# Altium PCB Voltage Indicator.PcbDoc
Units mm, origin at the board's own origin, x right, y up, seen from the top; angles counter-clockwise.
Board outline 39.75 x 28.07 mm, 2 copper layers (Top Layer, Bottom Layer); 5 components, 4 nets, 16 pads, 2 vias.
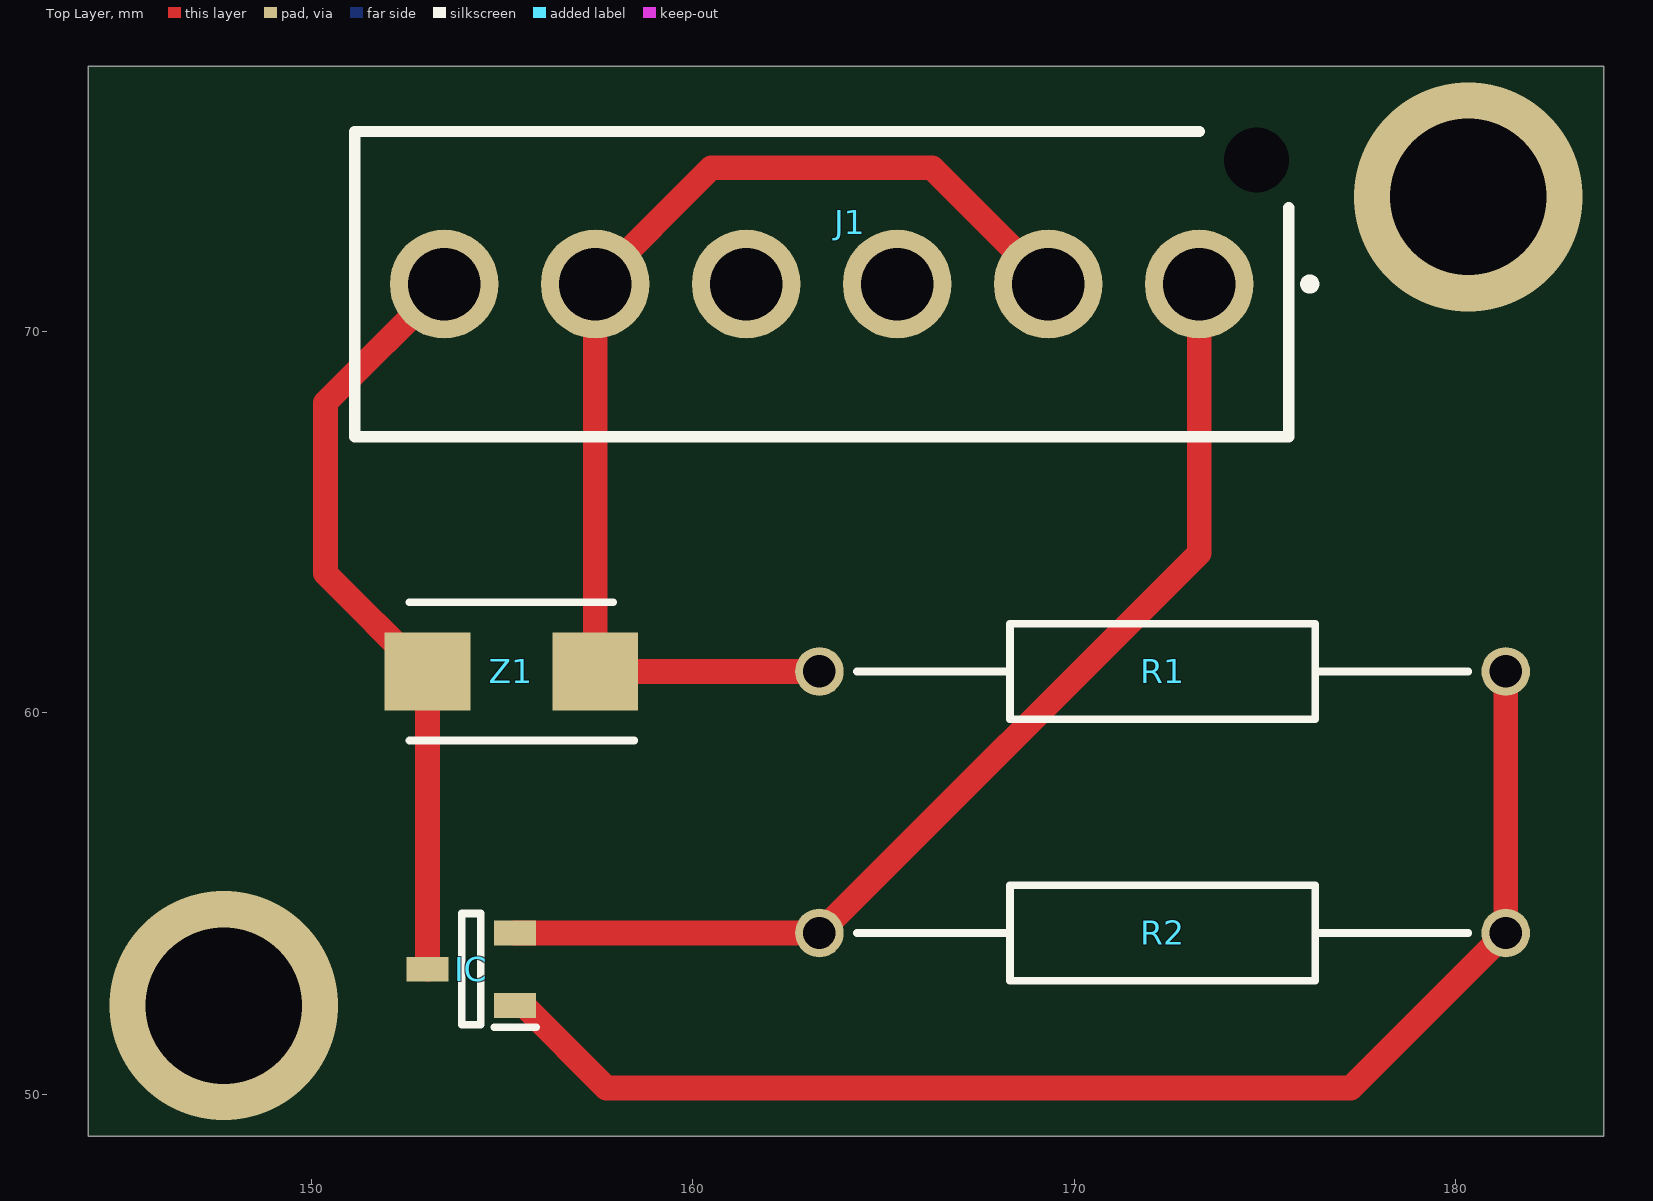
[diagram p0: Top Layer view]
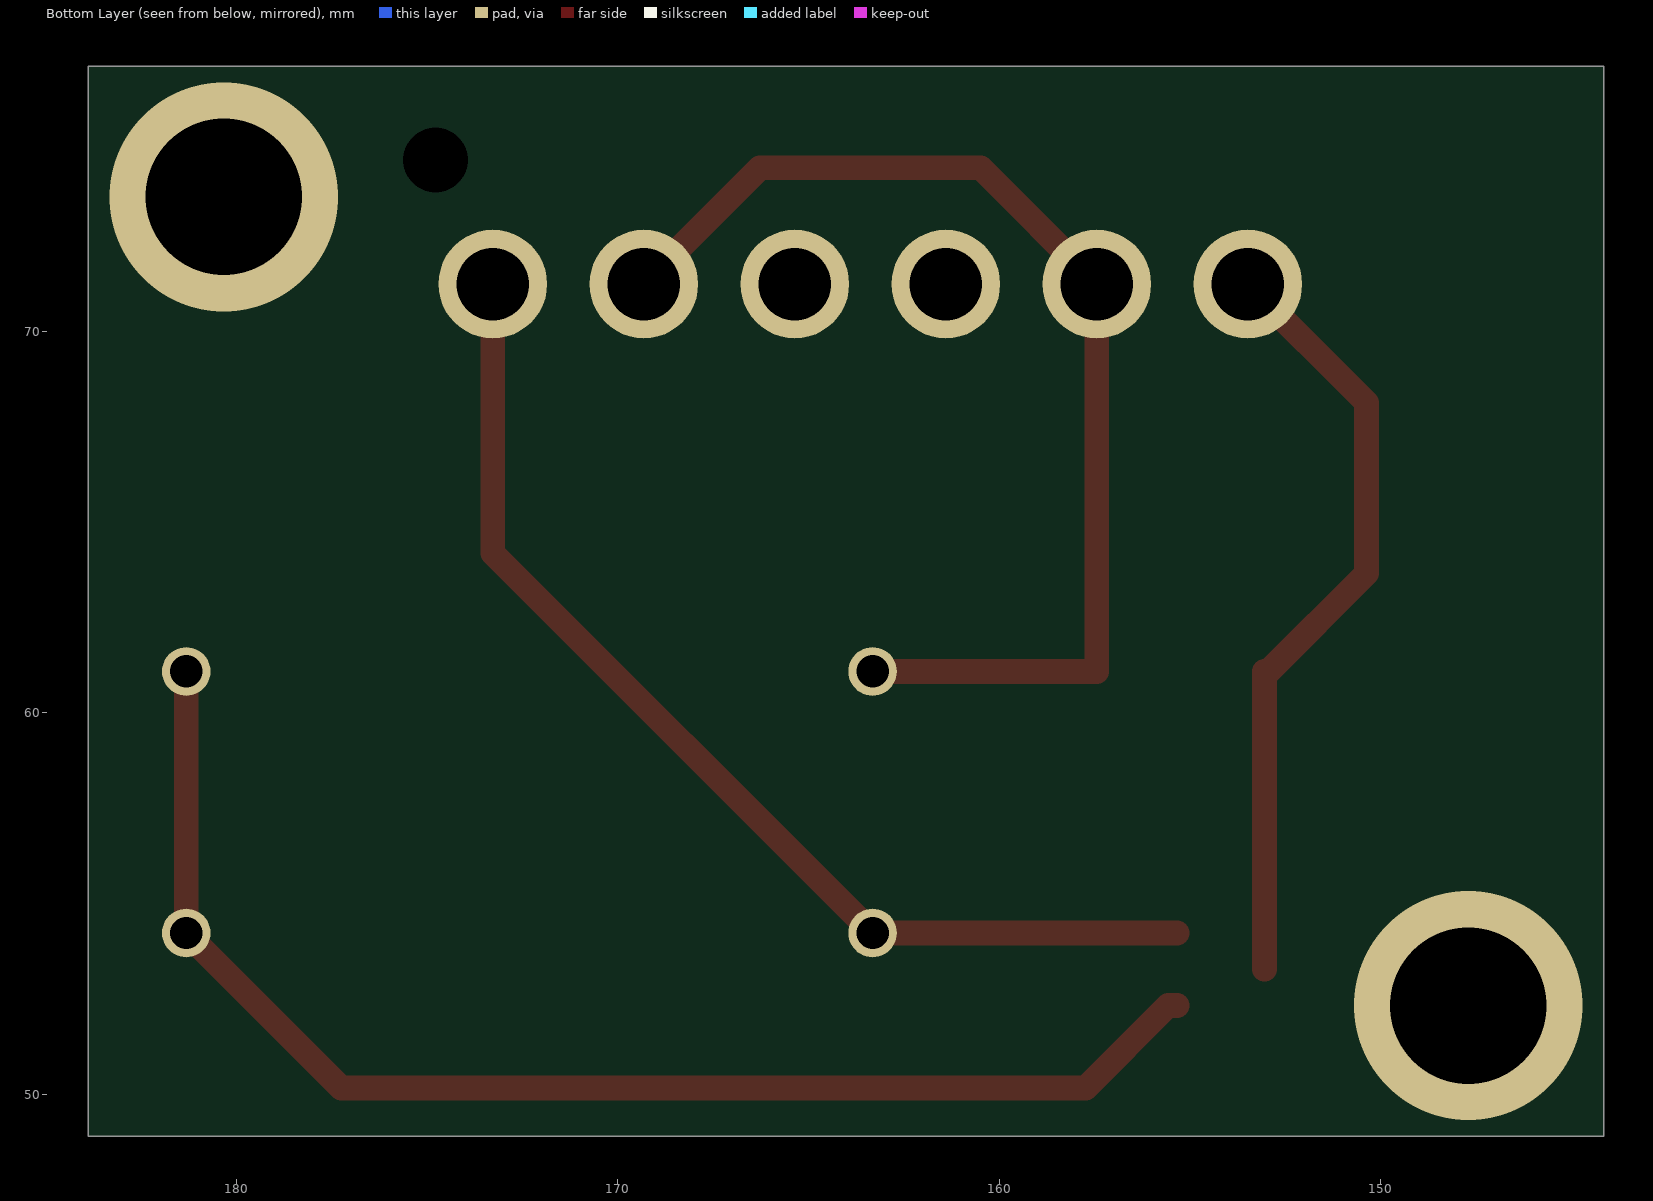
[diagram p1: Bottom Layer view, seen from below]
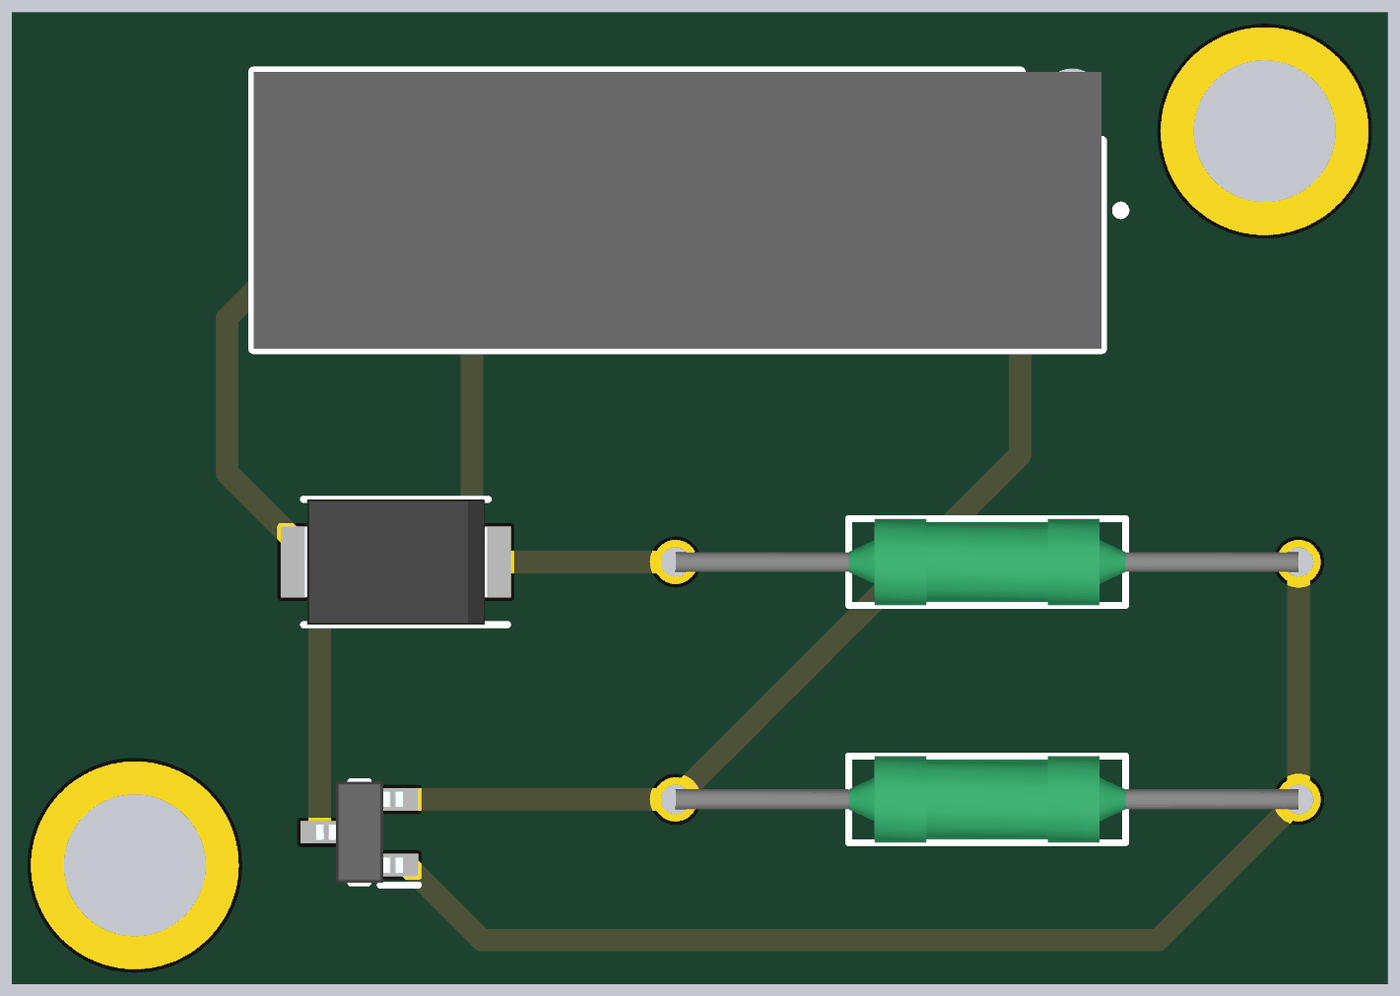
[diagram p2: 3D render of the assembled board from above, using the file's embedded part models]

## Layer stack, top to bottom
Top Solder: solder mask 0.0102, Solder Resist, Dk 3.5
Top Layer: signal copper 0.0356
Dielectric 1: dielectric 0.32, FR-4, Dk 4.8
Bottom Layer: signal copper 0.0356
Bottom Solder: solder mask 0.0102, Solder Resist, Dk 3.5

## Board outline
144.145,48.895 183.896,48.895 183.896,76.962 144.145,76.962

## Design rules (kind name [scope] priority, off if disabled: settings)
Clearance [All] p1: gap=0.254 ignorepadtopadclearanceinfootprint=FALSE except(0: Arc-Hole Track-Hole SMDPad-Hole THPad-Hole Via-Hole Fill-Hole Poly-Hole Region-Hole Text-Hole)
PolygonConnect [All] p1: connectstyle=Relief reliefconductorwidth=0.254 reliefentries=4 polygonreliefangle="90 Angle" airgapwidth=0.254
RoutingVias [All] p1: holewidth=0.711 width=1.27 viastyle="Through Hole" minholewidth=0.711 minwidth=1.27 maxholewidth=0.711 maxwidth=1.27
SolderMaskExpansion [All] p1: expansion=0.102 istentingtop=FALSE
Width [All] p1: maxlimit=0.65 minlimit=0.65 preferedwidth=0.65 minimp=50.000000 maximp=50.000000 favimp=50.000000
30 further rules are at their usual default settings.

## Components (designator, comment, footprint, x,y, rotation, side; value= is the part's Value field where it differs from the comment)
IC "NDS355AN" SOT95P251X112-3N 154.192,53.279 r180 top
J1 "DF63-6P-3.96DS" DF636P396DS 173.282,71.247 r0 top
R1 "470K" RESAD1800W63L800D250 181.322,61.087 r180 top
R2 "7.5K" RESAD1800W63L800D250 181.322,54.229 r180 top
Z1 "SMBJ5350B-TP" DIOM5336X261N 155.242,61.087 r180 top

## Footprints (in the part's own frame and the unit in brackets; to place one, negate y for a bottom-side part, rotate by r counter-clockwise, add the part's x,y. Pads: shape width x height; smd on the part's side, far side on the other; paste and mask are expansions set on the pad)
DF636P396DS [mm]
  round 2.85 hole 1.9: 1(0,0) 2(-3.96,0) 3(-7.92,0) 4(-11.88,0) 5(-15.84,0) 6(-19.8,0)
  round 0.85 hole 1.7 unplated: 7(1.5,3.25)
  silkscreen extent -22.15,-4 3,4, body extent -22.15,-4 2.35,4, height 10.1
DIOM5336X261N [mm]
  rect 2.25x2.05 smd: 1(-2.2,0) 2(2.2,0)
  silkscreen extent -3.22,-1.81 2.67,1.81, body extent -2.67,-1.81 2.67,1.81, height 2.61
RESAD1800W63L800D250 [mm]
  round 1.275 hole 0.85: 1(0,0) 2(18,0)
  silkscreen extent 0.99,-1.25 17.01,1.25, body extent 0,-1.25 18,1.25, height 2.5
SOT95P251X112-3N [mm]
  rect 1.1x0.65 smd: 1(-1.15,0.95) 2(-1.15,-0.95) 3(1.15,0)
  silkscreen extent -1.7,-1.46 0.25,1.53, body extent -1.25,-1.46 1.25,1.46, height 1.12

## Part data
IC: "Integrated Circuit", Manufacturer_Name=onsemi, Mouser Part Number=512-NDS355AN, Arrow Part Number=NDS355AN, Arrow Price/Stock=https://www.arrow.com/en/products/nds355an/on-semiconductor?region=nac, Datasheet Link=https://www.mouser.de/datasheet/2/308/NDS355AN-D-1813055.pdf, Height=1.12mm, Manufacturer_Part_Number=NDS355AN, Mouser Price/Stock=https://www.mouser.co.uk/ProductDetail/ON-Semiconductor-Fairchild/NDS355AN?qs=FOlmdCx%252BAA0yQlAVFAsL8w%3D%3D
J1: "Connector", Manufacturer_Name=Hirose, Mouser Part Number=798-DF63-6P-3.96DS, Height=10mm, Manufacturer_Part_Number=DF63-6P-3.96DS, Mouser Price/Stock=https://www.mouser.co.uk/ProductDetail/Hirose-Connector/DF63-6P-396DS?qs=vcbW%252B4%252BSTIpqvfLgfAUSZA%3D%3D
R1 R2: library part PR01000104700JR500, "Resistor", Manufacturer_Name=Vishay, Mouser Part Number=594-5073NW470R0J, Datasheet Link=http://www.vishay.com/docs/28729/pr010203.pdf, Manufacturer_Part_Number=PR01000104700JR500, Mouser Price/Stock=https://www.mouser.co.uk/ProductDetail/Vishay-BC-Components/PR01000104700JR500?qs=AI63Xxb%2F5RSGrbRBDk%2F12A%3D%3D
Z1: "Zener Diode", Manufacturer_Name=MCC, Mouser Part Number=833-SMBJ5350B-TP, Arrow Part Number=SMBJ5350B-TP, Arrow Price/Stock=https://www.arrow.com/en/products/smbj5350b-tp/micro-commercial-components, Datasheet Link=https://datasheet.datasheetarchive.com/originals/distributors/Datasheets_SAMA/a60ad652ec0afa86ef037664c8e865a3.pdf, Height=2.61mm, Manufacturer_Part_Number=SMBJ5350B-TP, Mouser Price/Stock=https://www.mouser.co.uk/ProductDetail/Micro-Commercial-Components-MCC/SMBJ5350B-TP?qs=ZNK0BnemlqFnl95cTboLBQ%3D%3D

## Via types
v1: diameter 6, hole 4.1, Top Layer to Bottom Layer, 2 vias

## Nets (pads, with @x,y where several pads share a name; then routed paths per layer and width w, separated by ;. In a path a pad name is that pad's centre, name@x,y a point inside that pad or via, vN(x,y) a via of type N, cw(c..) or ccw(c..) an arc to the next point about the centre after c; other vN are vias at no path point)
LED+: J1.2 J1.5 R1.2 Z1.1 | length 30.4
  Top Layer w0.65: R1.2 Z1.1 J1.5 160.49,74.295 166.274,74.295 J1.2
LED-: IC.3 J1.6 Z1.2 | length 20.4
  Top Layer w0.65: IC.3 Z1.2 152.942,61.087 150.368,63.661 150.368,68.133 J1.6
NetIC_1: IC.1 R1.1 R2.1 | length 35.4
  Top Layer w0.65: IC.1 155.567,52.329 157.731,50.165 177.258,50.165 R2.1 R1.1
TS-: IC.2 J1.1 R2.2 | length 29.1
  Top Layer w0.65: IC.2 R2.2 173.282,64.189 J1.1
pads on no net: J1.3 J1.4 J1.7
copper on no net:
  other v1: 147.701,52.324 180.34,73.533